# Altium PCB PCB2.PcbDoc
Units mm, origin at the board's own origin, x right, y up, seen from the top; angles counter-clockwise.
Board outline 47.24 x 25.02 mm, 2 copper layers (Top Layer, Bottom Layer); 17 components, 13 nets, 114 pads, 7 vias.
Unrouted connection lines stored in the file: 18.
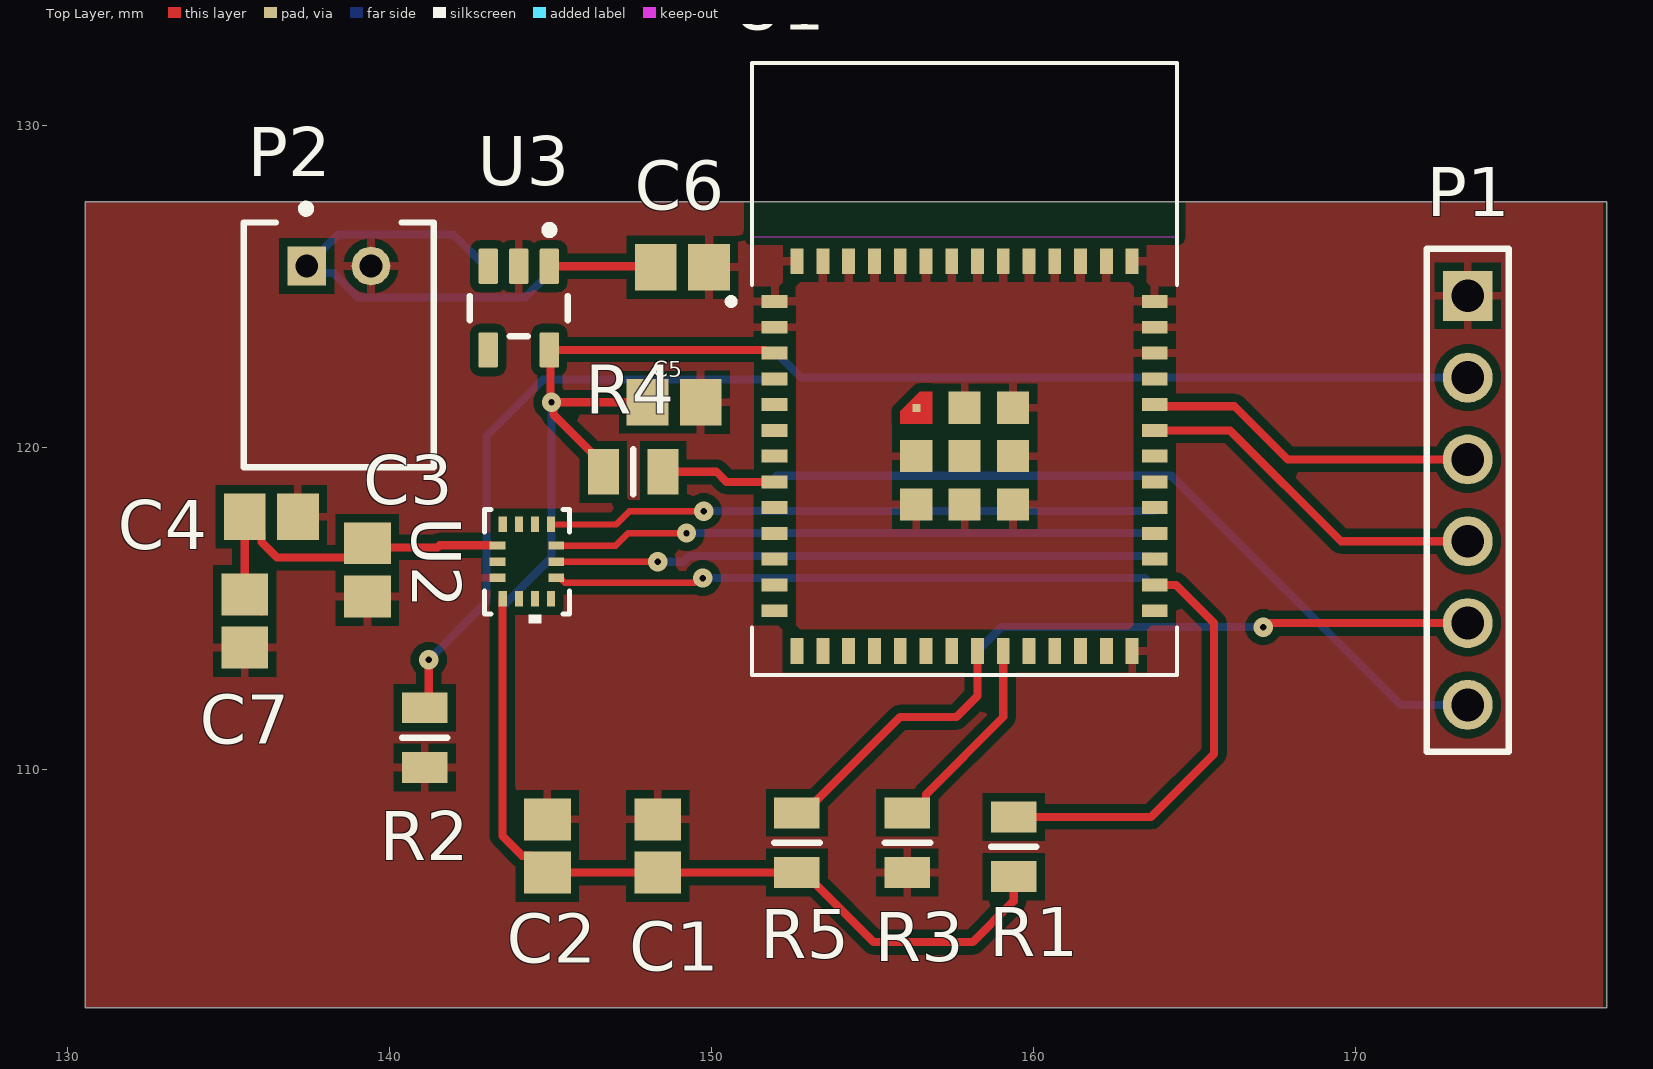
[diagram p0: Top Layer view]
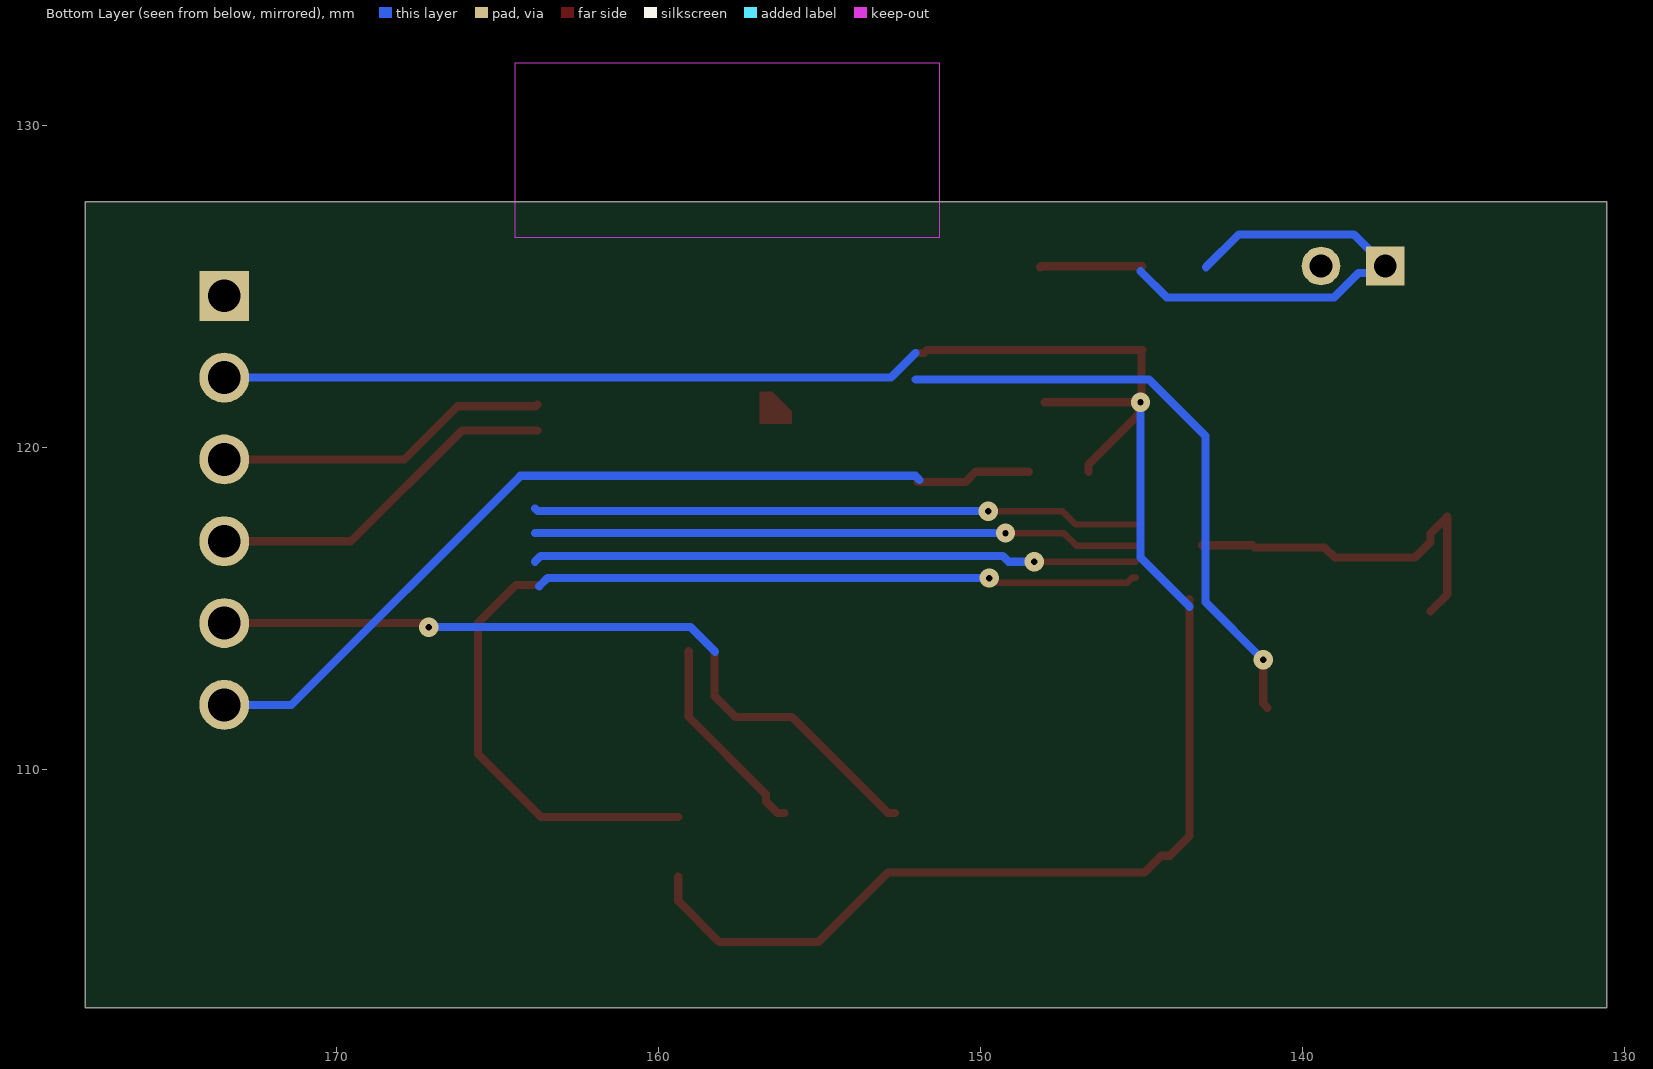
[diagram p1: Bottom Layer view, seen from below]
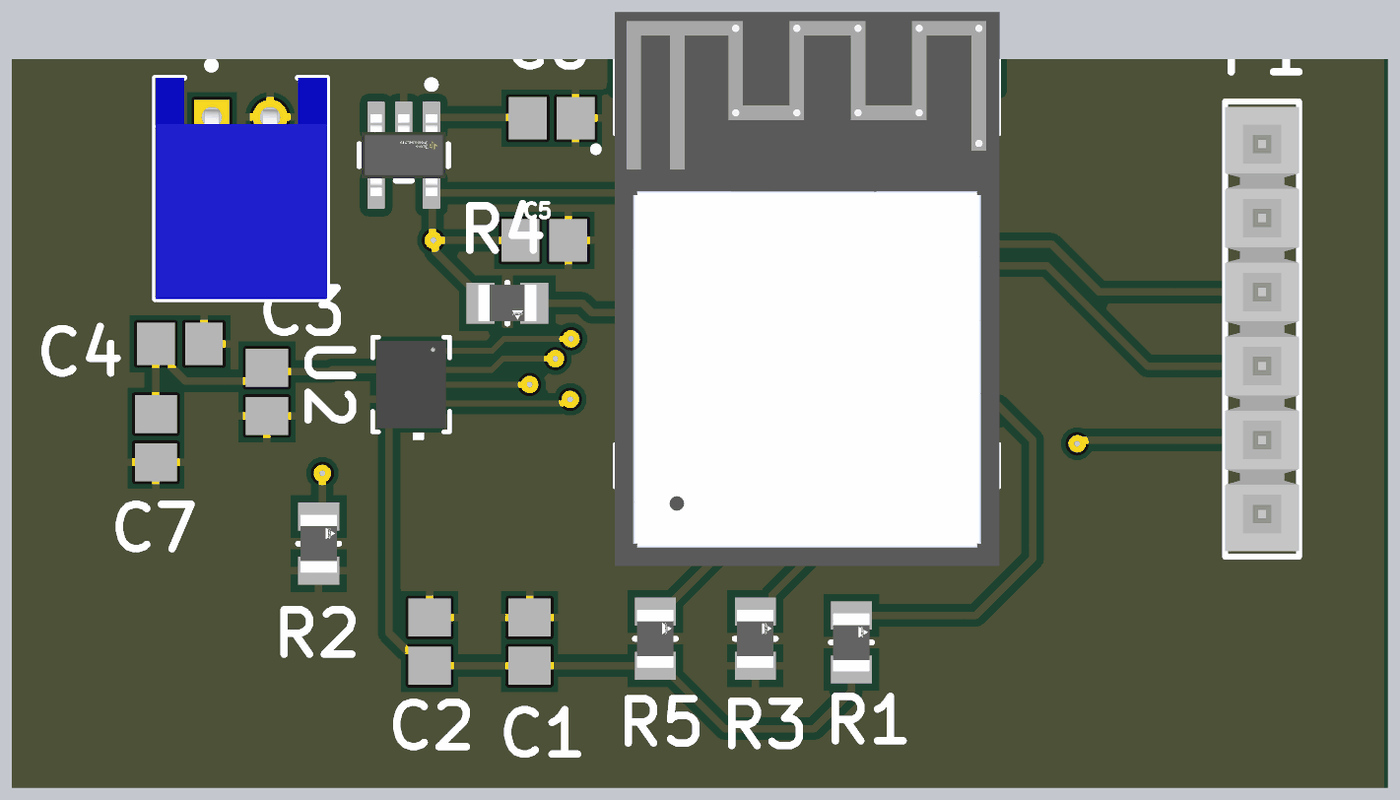
[diagram p2: 3D render of the assembled board from above, using the file's embedded part models]

## Layer stack, top to bottom
Top Solder: solder mask 0.0102, Solder Resist, Dk 3.5
Top Layer: signal copper 0.0356
Dielectric 1: dielectric 0.32, FR-4, Dk 4.8
Bottom Layer: signal copper 0.0356
Bottom Solder: solder mask 0.0102, Solder Resist, Dk 3.5

## Board outline
130.556,102.616 177.8,102.616 177.8,127.635 130.556,127.635

## Design rules (kind name [scope] priority, off if disabled: settings)
Clearance [All] p1: gap=0.254 ignorepadtopadclearanceinfootprint=FALSE
PolygonConnect [All] p1: connectstyle=Relief reliefconductorwidth=0.254 reliefentries=4 polygonreliefangle="90 Angle" airgapwidth=0.254
RoutingVias [All] p1: holewidth=0.2 width=0.6 viastyle="Through Hole" minholewidth=0.2 minwidth=0.6 maxholewidth=0.2 maxwidth=0.6
SolderMaskExpansion [All] p1: expansion=0.102 istentingtop=FALSE
SupplyNets "Schematic Supply Nets_2" [InNet('VBAT')] p1: voltage=0.000
SupplyNets "Schematic Supply Nets_1" [InNet('GND')] p2: voltage=0.000
SupplyNets "Schematic Supply Nets" [InNet('3V3')] p3: voltage=0.000
Width [All] p1: maxlimit=0.8 minlimit=0.2 preferedwidth=0.254 toplayer_prefwidth=0.2 bottomlayer_minwidth=0.254 bottomlayer_maxwidth=0.254 minimp=50.000000 maximp=50.000000 favimp=50.000000
30 further rules are at their usual default settings.

## Classes and differential pairs
component class Sheet1: C1 C2 C3 C4 C5 C6 C7 P1 P2 R1 R2 R3 R4 R5 U2 U3

## Components (designator, comment, footprint, x,y, rotation, side; value= is the part's Value field where it differs from the comment)
C1 "10u" CAPC2013X145X48NL20T23 148.336,107.633 r90 top
C2 "100n" CAPC2013X145X48NL20T23 144.907,107.633 r90 top
C3 "100n" CAPC2013X145X48NL20T23 139.319,116.205 r270 top
C4 "10n" CAPC2013X145X48NL20T23 136.334,117.856 r0 top
C5 "1u" CAPC2013X145X48NL20T23 148.844,121.412 r0 top
C6 "1u" CAPC2013X145X48NL20T23 149.098,125.603 r0 top
C7 "100n" CAPC2013X145X48NL20T23 135.509,114.618 r270 top
P1 "TSW-106-23-G-S" SMTC-TSW-106-23-X-S 173.482,124.714 r270 top
P2 "S2B-PH-K-S(LF)(SN)" JST-S2B-PH-K-S_V 138.43,123.19 r0 top
R1 "10k" FP-MCU0805-IPC_B 159.385,107.607 r90 top
R2 "10k" FP-MCU0805-IPC_B 141.097,110.998 r90 top
R3 "10k" FP-MCU0805-IPC_B 156.083,107.734 r90 top
R4 "10k" FP-MCU0805-IPC_B 147.574,119.253 r0 top
R5 "10k" FP-MCU0805-IPC_B 152.654,107.734 r90 top
U1 "ESP32-MINI-1-N4" XCVR_ESP32-MINI-1-N4 157.861,119.737 r0 top
U2 "BMI323" BMI323_BOS 144.272,116.459 r270 top
U3 "TLV75533PDBVR" FP-DBV0005A-MFG 144.018,124.333 r270 top

## Footprints (in the part's own frame and the unit in brackets; to place one, negate y for a bottom-side part, rotate by r counter-clockwise, add the part's x,y. Pads: shape width x height; smd on the part's side, far side on the other; paste and mask are expansions set on the pad)
BMI323_BOS [mil]
  rect 19x10 smd paste+0 mask+0: 1(-45.5,29.53) 2(-45.5,9.84) 3(-45.5,-9.84) 4(-45.5,-29.53) 8(45.5,-29.53) 9(45.5,-9.84) 10(45.5,9.84) 11(45.5,29.53)
  rect 10x19 smd paste+0 mask+0: 5(-19.69,-36) 6(0,-36) 7(19.69,-36) 12(19.69,36) 13(0,36) 14(-19.69,36)
  silkscreen extent -64,-52 75,52, body extent -59,-47 59,47, height 34
CAPC2013X145X48NL20T23 [mm] "Chip Capacitor, 2-Leads, Body 2.00x1.25mm, IPC Medium Density"
  rect 1.3x1.45 smd: 1(-0.825,0) 2(0.825,0)
  body extent -1.1,-0.72 1.1,0.72, height 1.45
FP-DBV0005A-MFG [mm]
  rrect17% 1.1x0.6 smd paste+0 mask+0: 1(-1.3,0.95) 2(-1.3,0) 3(-1.3,-0.95) 4(1.3,-0.95) 5(1.3,0.95)
  silkscreen extent -2.55,-1.53 0.87,1.52, body extent -1.95,-1.78 1.95,1.78, height 0.25
FP-MCU0805-IPC_B [mm]
  rect 0.959x1.408 smd paste+0 mask+0: 1(-0.927,0) 2(0.927,0)
  silkscreen extent 0,-0.7 0,0.7, body extent -1.66,-0.95 1.66,0.95, height 0.25
JST-S2B-PH-K-S_V [mm] "THD, 2-Leads, Body 7.6x5.9mm, Pitch 2mm"
  rect 1.2x1.2 hole 0.7: 1(-1,2.45)
  round 1.2 hole 0.7: 2(1,2.45)
  silkscreen extent -2.95,-3.8 2.95,4.35, body extent -2.95,-3.8 2.95,3.8, height 4.8
SMTC-TSW-106-23-X-S [mm] ".025 SQ Post Terminal Strip Assembly, 1x6 Pins, Vertical, 2.54mm Pitch, Male"
  rect 1.55x1.55 hole 1.02: 1(0,0)
  round 1.55 hole 1.02: 2(2.54,0) 3(5.08,0) 4(7.62,0) 5(10.16,0) 6(12.7,0)
  silkscreen extent -1.46,-1.27 14.16,1.27, body extent -1.27,-1.27 13.97,1.27, height 8.38
XCVR_ESP32-MINI-1-N4 [mm]
  rect 0.8x0.4 smd: 1(-5.9,4.8) 2(-5.9,4) 3(-5.9,3.2) 4(-5.9,2.4) 5(-5.9,1.6) 6(-5.9,0.8) 7(-5.9,0) 8(-5.9,-0.8) 9(-5.9,-1.6) 10(-5.9,-2.4) 11(-5.9,-3.2) 12(-5.9,-4) 13(-5.9,-4.8) 28(5.9,-4.8) 29(5.9,-4) 30(5.9,-3.2) 31(5.9,-2.4) 32(5.9,-1.6) 33(5.9,-0.8) 34(5.9,0) 35(5.9,0.8) 36(5.9,1.6) 37(5.9,2.4) 38(5.9,3.2) 39(5.9,4) 40(5.9,4.8)
  rect 0.4x0.8 smd: 14(-5.2,-6.05) 15(-4.4,-6.05) 16(-3.6,-6.05) 17(-2.8,-6.05) 18(-2,-6.05) 19(-1.2,-6.05) 20(-0.4,-6.05) 21(0.4,-6.05) 22(1.2,-6.05) 23(2,-6.05) 24(2.8,-6.05) 25(3.6,-6.05) 26(4.4,-6.05) 27(5.2,-6.05) 41(5.2,6.05) 42(4.4,6.05) 43(3.6,6.05) 44(2.8,6.05) 45(2,6.05) 46(1.2,6.05) 47(0.4,6.05) 48(-0.4,6.05) 49(-1.2,6.05) 50(-2,6.05) 51(-2.8,6.05) 52(-3.6,6.05) 53(-4.4,6.05) 54(-5.2,6.05)
  rect 0.25x0.25 smd paste-1 mask+0: 55_1(-1.5,1.5)
  rect 1x1 smd: 55_2(0,1.5) 55_3(1.5,1.5) 55_4(-1.5,0) 55_5(0,0) 55_6(1.5,0) 55_7(-1.5,-1.5) 55_8(0,-1.5) 55_9(1.5,-1.5)
  Top Layer region: -1,1 -2,1 -2,1.4 -1.4,2 -1,2
  Keep-Out Layer region: 6.6,6.8 -6.6,6.8 -6.6,12.2 6.6,12.2
  silkscreen extent -7.35,-6.8 6.6,12.2, body extent -6.6,-9.5 6.6,9.5, height 2.55

## Part data
C1 C2 C3 C4 C5 C6 C7: library part CMP-2007-01790-1, Manufacturer=Vitramon, Part Number=VJ0805Y222JXAAC
P1: library part CMP-1024-00396-1, "0.025\" SQ Post Header, Through-hole, Vertical, -55 to 125 degC, 2.54 mm Pitch, 6-Pin, Male, RoHS", Manufacturer=Samtec, Temperature Range="-55 to 125 degC", ComponentLink1Description="Manufacturer URL", ComponentLink1URL=http://www.samtec.com, ComponentLink2Description=Datasheet, ComponentLink2URL=http://www.samtec.com/documents/webfiles/pdf/TSW_TH.PDF, ComponentLink3Description="Package Specification", ComponentLink3URL=http://www.samtec.com/documents/webfiles/cpdf/TSW-XXX-XX-XXX-X-XX-XXX-MKT.pdf, DatasheetVersion=F-214, Mounting Technology=Through-hole, Orientation=Vertical, PackageDescription=".025[0.64] SQ. Post Terminal Strip Assembly", PackageReference=TSW-106-23-X-S, PackageVersion="DM, 8/1988", PartNumber=TSW-106-23-G-S, Pitch="2.54 mm", RoHS=True
P2: library part CMP-1755-00004-1, "Male Header, Pitch 2 mm, 1 x 2 Position, Height 4.8 mm, Tail Length 3.4 mm, -25 to 85 degC, RoHS, Bulk", Capacitance="10 uF", Case\Package=Radial, Max Operating Temperature="85 degC", Min Operating Temperature="-40 degC", Package Quantity=200, Tolerance=20%, Voltage Rating="50 V", ComponentLink1Description=Datasheet, ComponentLink1URL=http://www.jst-mfg.com/product/pdf/eng/ePH.pdf, DatasheetVersion=Dec-12, Diameter="5 mm", Height="11 mm", Lead Pitch="2 mm", Length="11 mm", Mount="Through Hole", PackageDescription="Male Header, Pitch 2 mm, 1 x 2 Position, Height 4.8 mm, Tail Length 3.4 mm", PackageReference=S2B-PH-K-S, Packaging=Bulk, Pins=2, Radiation Hardening=No, REACH SVHC="No SVHC", RoHSCompliant=true, Voltage Rating (DC)="50 V"
R1: library part CMP-02407-001108-1, Case Code (Imperial)=0805, Case Code (Metric)=2012, Max Operating Temperature=155°C, Max Power Dissipation=200mW, Min Operating Temperature=-55°C, Package Quantity=1000, Resistance=51.1kR, Temperature Coefficient=25ppm/°C, Tolerance=0.1%, Voltage Rating=150V, Case/Package=0805, Composition="Thin Film", Features="Automotive AEC-Q200", Height=0.024inch, Length=0.079inch, Number of Terminations=2, Packaging="Tape and Reel", Power Rating=200mW, Termination=SMD/SMT, Weight=0.000162oz, Width=0.049inch
R2 R3 R4 R5: library part CMP-02407-001108-1, "RES 1.05K OHM 0.5% 1/5W 0805", Case Code (Imperial)=0805, Case Code (Metric)=2012, Max Operating Temperature=155°C, Max Power Dissipation=200mW, Min Operating Temperature=-55°C, Package Quantity=1000, Resistance=51.1kR, Temperature Coefficient=25ppm/°C, Tolerance=0.1%, Voltage Rating=150V, Case/Package=0805, Composition="Thin Film", Features="Automotive AEC-Q200", Height=0.024inch, Length=0.079inch, Number of Terminations=2, Packaging="Tape and Reel", Power Rating=200mW, Termination=SMD/SMT, Weight=0.000162oz, Width=0.049inch
U1: "Bluetooth, WiFi 802.11b/g/n, Bluetooth v4.2 +EDR, Class 1, 2 and 3 Transceiver Module 2.412GHz ~ 2.484GHz Integrated, Trace Chassis Mount", Package="Module Espressif Systems", Check_prices=https://www.snapeda.com/parts/ESP32-MINI-1-N4/Espressif+Systems/view-part/?ref=eda, MF="Espressif Systems", MP=ESP32-MINI-1-N4, SnapEDA_Link=https://www.snapeda.com/parts/ESP32-MINI-1-N4/Espressif+Systems/view-part/?ref=snap
U2: "Description", Manufacturer_Name="Bosch Sensortec", Copyright="Copyright (C) 2026 Ultra Librarian. All rights reserved.", Manufacturer_Part_Number=BMI323, RefDes=RefDes, Type=Type
U3: library part CMP-04917-000010-1, "IC REG LINEAR 3.3V 500MA SOT23-5", Ambient Temperature Range High=+70°C, Dropout Voltage=150mV, Manufacturer="Texas Instruments", Max Junction Temp=+125°C, Max Supply Voltage=5.5V, Min Supply Voltage=1.45V, Output Current=500mA, Output Voltage=3.3V, Package=DBV0005A, Temperature="-40°C to +125°C", Temperature Range Low=-40°C, Accuracy Percentage=1%, Automotive=No, Category=IC, ComponentLink2Description=Datasheet, ComponentLink2URL=http://www.ti.com/lit/ds/symlink/tlv755p.pdf, Device Class L1="Integrated Circuits (ICs)", Device Class L2="Power Management ICs", Device Class L3="Voltage Regulators - Linear", Digikey Description="IC REG LINEAR 3.3V 500MA SOT23-5", Height=1.45mm, Lead Free=Yes, Manufacturer Part Number=TLV75533PDBVR, Mouser Description="500-mA low-IQ small-size low-dropout (LDO) regulator 5-SOT-23 -40 to 125", Number Of Outputs=1, Octopart=https://octopart.com/tlv75533pdbvr-texas+instruments-91272349, Output Type=Fixed, RoHS=TRUE, Standoff Height=0mm, Temperature Range High=+125°C

## Via types
v1: diameter 0.6, hole 0.2, Top Layer to Bottom Layer, 7 vias

## Nets (pads, with @x,y where several pads share a name; then routed paths per layer and width w, separated by ;. In a path a pad name is that pad's centre, name@x,y a point inside that pad or via, vN(x,y) a via of type N, cw(c..) or ccw(c..) an arc to the next point about the centre after c; other vN are vias at no path point)
3V3: C1.1 C2.1 C3.1 C4.1 C5.1 C7.1 P1.2 R1.1 R4.1 R5.1 U1.3 U2.5 U2.8 U3.5 | length 80.8
  Top Layer w0.254: C7.1@136.032,114.92 C7.1 C4.1 136.032,117.333 136.032,117.069 136.515,116.586 139.002,116.586 139.319,116.903 141.491,116.903 141.555,116.967 U2.5@143.129,116.967 ; U2.8 143.51,115.291 143.51,107.941 144.12,107.331 144.384,107.331 C2.1 C1.1 C1.1 R5.1 152.879,106.807 155.038,104.648 158.115,104.648 159.385,105.918 R1.1 ; R4.1 146.647,119.478 145.1,121.025 145.1,121.346 v1(145.034,121.412) ; C5.1 v1(145.034,121.412) ; U1.3 151.761,122.937 151.665,123.033 U3.5 145.001,123 145.001,121.445 v1(145.034,121.412)
  Bottom Layer w0.254: 143.51,115.062 145.034,116.586 v1(145.034,121.412) ; 152.019,122.936 152.781,122.174 P1.2
CS: R1.2 U1.29 U2.12 | length 32.2
  Top Layer w0.2: U2.12 145.301,115.959 145.328,115.932 145.328,115.922 145.445,115.805 149.479,115.805 149.625,115.951 v1(149.733,115.951)
  Top Layer w0.254: R1.2 163.651,108.533 165.608,110.49 165.608,114.554 164.425,115.737 U1.29
  Bottom Layer w0.254: v1(149.733,115.951) 163.449,115.951 163.703,115.697
EN: P1.6 R4.2 U1.8 | length 28.2
  Top Layer w0.254: R4.2 150.149,119.253 150.465,118.937 U1.8
  Bottom Layer w0.254: 151.892,118.999 152.019,119.126 164.29,119.126 171.402,112.014 P1.6
GND: C1.2 C2.2 C3.2 C4.2 C5.2 C6.2 C7.2 P1.1 P2.2 R2.1 R3.1 U1.1 U1.2 U1.27 U1.38 U1.39 U1.40 U1.41 U1.42 U1.43 U1.44 U1.45 U1.46 U1.47 U1.48 U1.49 U1.50 U1.51 U1.52 U1.53 U1.54 U1.55_1 U1.55_2 U1.55_3 U1.55_4 U1.55_5 U1.55_6 U1.55_7 U1.55_8 U1.55_9 U2.6 U2.7 U3.2
INT1: R3.2 U1.22 U2.4 | length 6.4
  Top Layer w0.254: R3.2 156.308,108.66 156.66,109.013 156.66,109.238 159.061,111.638 U1.22
INT2: R2.2 U1.4 U2.9 | length 19
  Top Layer w0.254: R2.2 141.224,112.052 v1(141.224,113.411)
  Bottom Layer w0.254: v1(141.224,113.411) 143.021,115.208 143.021,120.362 144.773,122.114 152.011,122.114
IO0: P1.5 R5.2 U1.21 | length 24.1
  Top Layer w0.254: R5.2 152.879,108.66 155.851,111.633 157.607,111.633 158.261,112.287 U1.21 ; v1(167.132,114.427) 167.226,114.427 167.353,114.554 P1.5
  Bottom Layer w0.254: 158.242,113.665 159.004,114.427 v1(167.132,114.427)
MISO: U1.32 U2.1 | length 19
  Top Layer w0.2: U2.1 147.041,117.615 147.456,118.029 v1(149.758,118.029)
  Bottom Layer w0.254: v1(149.758,118.029) 163.749,118.029 163.83,118.11
MOSI: U1.31 U2.14 | length 18.8
  Top Layer w0.2: U2.14 147.028,116.959 147.417,117.348 v1(149.225,117.348)
  Bottom Layer w0.254: v1(149.225,117.348) 163.83,117.348
RX: P1.4 U1.35 | length 11.1
  Top Layer w0.254: U1.35 166.102,120.537 169.545,117.094 P1.4
SCK: U1.30 U2.13 | length 18.8
  Top Layer w0.2: U2.13 v1(148.336,116.459)
  Bottom Layer w0.254: v1(148.336,116.459) 149.136,116.459 149.309,116.632 163.657,116.632 163.83,116.459
TX: P1.3 U1.36 | length 10.4
  Top Layer w0.254: U1.36 163.813,121.285 166.243,121.285 167.894,119.634 P1.3
VBAT: C6.1 P2.1 U3.1 U3.3 | length 17.9
  Top Layer w0.254: U3.1 148.116,125.633 C6.1@148.146,125.603
  Bottom Layer w0.254: 143.002,125.603 141.984,126.621 138.411,126.621 P2.1 137.65,125.42 138.262,125.42 139.024,124.659 144.217,124.659 145.034,125.476
pads on no net: U1.5 U1.6 U1.7 U1.9 U1.10 U1.11 U1.12 U1.13 U1.14 U1.15 U1.16 U1.17 U1.18 U1.19 U1.20 U1.23 U1.24 U1.25 U1.26 U1.28 U1.33 U1.34 U1.37 U2.2 U2.3 U2.10 U2.11 U3.4

## Polygon pours and split planes (outlines as drawn)
GND on Top Layer "GND_L01_P000" (solid, pour order 0): 130.556,127.635 177.673,127.635 177.673,102.616 130.556,102.616

## Text inside footprints (layer, text, board x,y; h text height)
U2: Mechanical 13 "*" at 144.637,117.691 h1.27 r270